# Altium PCB PCB1.PcbDoc
Units mil, origin at the board's own origin, x right, y up, seen from the top; angles counter-clockwise.
Board outline 787.27 x 543.66 mil, 2 copper layers (Top Layer, Bottom Layer); 9 components, 4 nets, 21 pads, 5 vias.
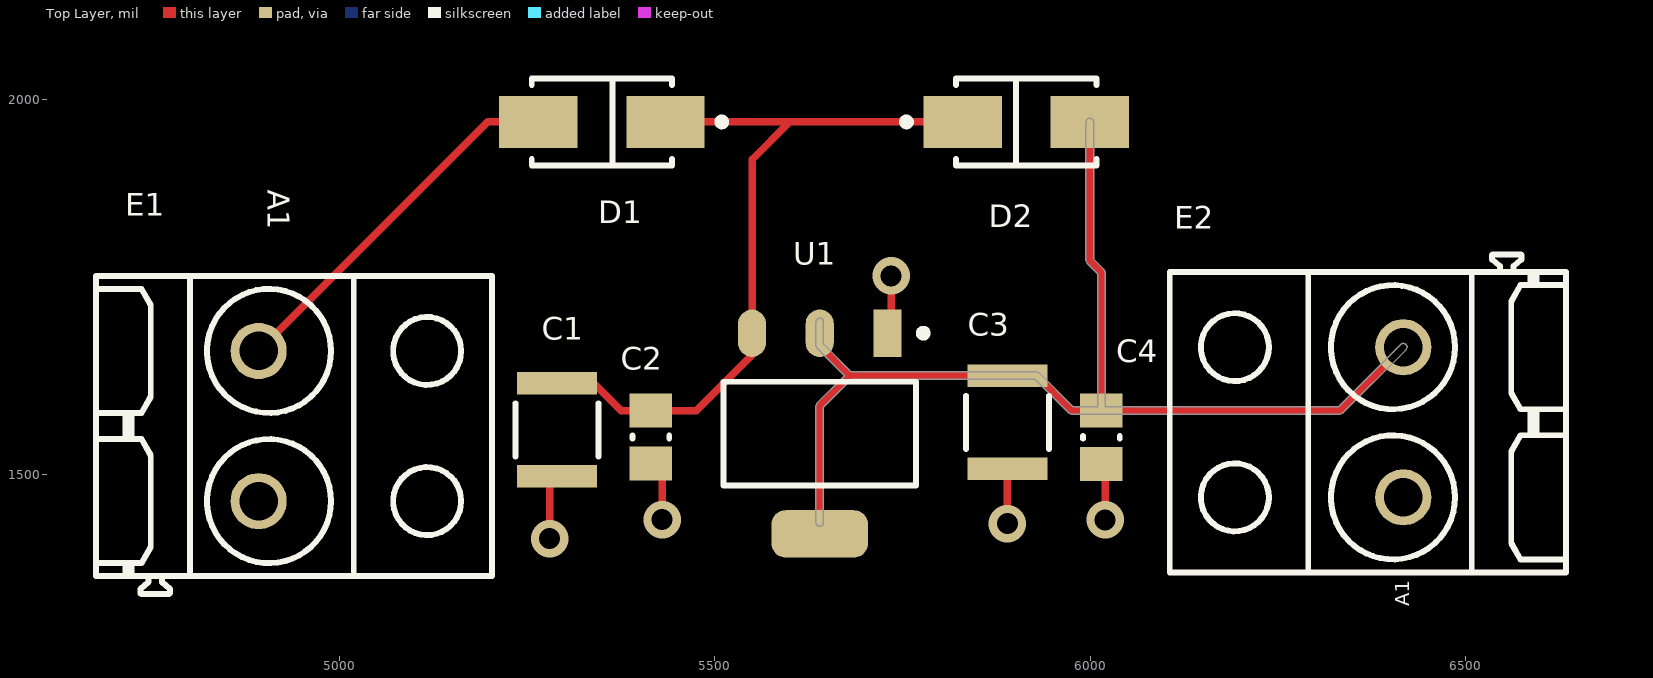
[diagram p0: Top Layer view]
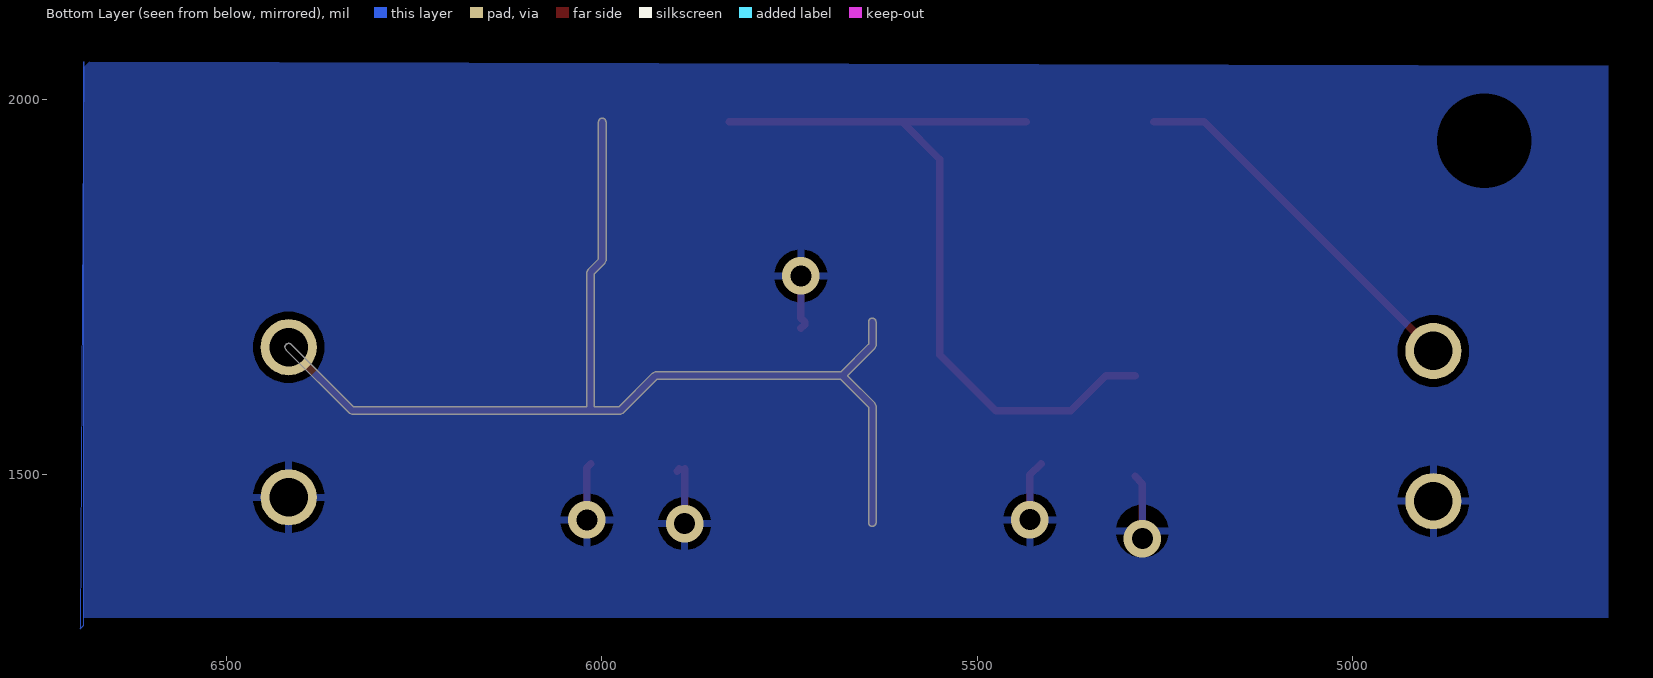
[diagram p1: Bottom Layer view, seen from below]

## Layer stack, top to bottom
Top Solder: solder mask 0.4, Solder Resist, Dk 3.5
Top Layer: signal copper 1.4
Dielectric 1: dielectric 12.6, FR-4, Dk 4.8
Bottom Layer: signal copper 1.4
Bottom Solder: solder mask 0.4, Solder Resist, Dk 3.5

## Board outline
5634.98,1436.34 ccw(c5640,1436.34) 5645.02,1436.34 5645.02,1589.93 5682.08,1626.99 5926.92,1626.99 5972.03,1581.89 5975.57,1580.42 6332.68,1580.42 6336.22,1581.89 6420.79,1666.45 6422.26,1670 ccw(c6417.24,1670) 6413.7,1673.55 6330.6,1590.45 6020.02,1590.45 6020.02,1770 6018.55,1773.55 6004.66,1787.43 6004.66,1970 ccw(c5999.65,1970) 5994.63,1970 5994.63,1785.35 5996.1,1781.81 6009.98,1767.92 6009.98,1590.45 5977.65,1590.45 5932.55,1635.55 5929,1637.02 5682.08,1637.02 5645.02,1674.09 5645.02,1703.66 ccw(c5640,1703.66) 5634.98,1703.66 5634.98,1672.01 5636.45,1668.46 5672.91,1632.01 5636.45,1595.55 5634.98,1592.01

## Design rules (kind name [scope] priority, off if disabled: settings)
Clearance [All] p1: gap=10 ignorepadtopadclearanceinfootprint=FALSE
PolygonConnect [All] p1: connectstyle=Relief reliefconductorwidth=10 reliefentries=4 polygonreliefangle="90 Angle" airgapwidth=10
RoutingVias [All] p1: holewidth=28 width=50 viastyle="Through Hole" minholewidth=28 minwidth=50 maxholewidth=28 maxwidth=50
SolderMaskExpansion [All] p1: expansion=4 istentingtop=FALSE
SupplyNets "Schematic Supply Nets" [InNet('GND')] p1: voltage=0.000
Width [All] p1: maxlimit=10 minlimit=10 preferedwidth=10
30 further rules are at their usual default settings.

## Components (designator, comment, footprint, x,y, rotation, side; value= is the part's Value field where it differs from the comment)
C1 "22uF" FP-C3225-250-0_4-IPC_C 5290,1560 r270 top
C2 "100nF" CAPC0805(2012)100_N 5415,1550.31 r90 top
C3 "22uF" FP-C3225-250-0_4-IPC_C 5890,1570 r270 top
C4 "100nF" CAPC0805(2012)100_N 6015,1550 r90 top
D1 "SS14" FP-403AE-MFG 5350,1970 r0 top
D2 "SS14" FP-403AE-MFG 5915,1970 r180 top
E1 "Vin 5V" LPP_5_08_90_02 4940,1565 r270 top
E2 "Vout 3.3V" LPP_5_08_90_02 6370,1570 r90 top
U1 "AMS1117-3.3" FP-AMS1117-IPC_A 5640,1555 r270 top

## Footprints (in the part's own frame and the unit in brackets; to place one, negate y for a bottom-side part, rotate by r counter-clockwise, add the part's x,y. Pads: shape width x height; smd on the part's side, far side on the other; paste and mask are expansions set on the pad)
CAPC0805(2012)100_N [mm] "Chip Capacitor, Body 2.0x1.2mm, Height 1.0mm, IPC Medium Density"
  rect 1.15x1.45 smd: 1(-0.9,0) 2(0.9,0)
  silkscreen extent -0.05,-0.62 0.05,0.62, body extent -1.1,-0.72 1.1,0.73, height 1
FP-403AE-MFG [mm]
  rect 2.65x1.75 smd paste+0 mask+0: 1(-2.15,0) 2(2.15,0)
  silkscreen extent -2.38,-1.47 4.18,1.47, body extent -3.57,-1.58 3.57,1.58, height 0.25
FP-AMS1117-IPC_A [mm]
  rect 1.604x0.952 smd paste+0 mask+0: 1(-3.395,2.29)
  rrect100% 1.604x0.952 smd paste+0 mask+0: 2(-3.395,0) 3(-3.395,-2.29)
  rrect59% 1.604x3.262 smd paste+0 mask+0: 4(3.395,0)
  silkscreen extent -3.52,-3.25 1.75,3.63, body extent -4.7,-3.75 4.7,3.75, height 0.25
FP-C3225-250-0_4-IPC_C [mm]
  rect 0.753x2.704 smd paste+0 mask+0: 1(-1.575,0) 2(1.575,0)
  silkscreen extent -0.9,-1.4 0.9,1.4, body extent -2.05,-1.5 2.05,1.5, height 0.25
LPP_5_08_90_02 [mm] "OMNIMATE Signal - Serie LP  LPP 5.08/02/90 3.2"
  round 1.9 hole 1.3: A1(-2.54,-1.2) A2(2.54,-1.2)
  silkscreen extent -5.08,-6.7 5.68,6.7, body extent -5.08,-6.7 5.68,6.7, height 17.01

## Part data
C1 C3: library part CMP-08246-001769-2, "Multilayer Ceramic Capacitors 22uF ±20% 25V X7R SMD 1210", RoHS Compliant=Yes
C2 C4: library part CMP-1036-04418-1, "CAP 100nF 50V ±5% 0805 (2012 Metric) Thickness 1mm SMD", Case-EIA=0805, Case-Metric=2012, Rated Voltage="50 V", Tolerance=Â±5%, Max Thickness="1 mm", Technology=SMT
D1 D2: library part CMP-2000-04943-2, "DIODE SCHOTTKY 40V 1A SMA", Forward Current=1A, Manufacturer="ON Semiconductor", Max Junction Temp=+125°C, Max Repetitive Reverse Voltage=40V, Max Surge Forward Current=40A, Package=403AE, Peak Reverse Current=0.2mA, Temperature="-65°C to +125°C", Temperature Range Low=-65°C, Automotive=No, Category=Diode, ComponentLink2Description=Datasheet, ComponentLink2URL=https://www.onsemi.com/pub/Collateral/SS19-D.PDF, Device Class L1="Discrete Semiconductors", Device Class L2=Diodes, Device Class L3="Schottky Diodes", Digikey Description="DIODE SCHOTTKY 40V 1A SMA", Height=2.5mm, Lead Free=Yes, Manufacturer Part Number=SS14, Mouser Description="Schottky Diodes & Rectifiers SMA 40V 1.0A", Octopart=https://octopart.com/ss14-on+semiconductor-29205033, RoHS=TRUE, Standoff Height=0.05mm, Temperature Range High=+125°C
E1 E2: library part CMP-1559-02057-1, "OMNIMATE Signal - series LP", Colour=Orange, Manufacturer=Weidmueller, PartNumber=1594400000, Rated_current_min_no_of_poles_TU_20_deg_C="32 A", Rated_current_use_group_B_UL_1059="20 A", Rated_voltage_for_surge_voltage_class_pollution_degree_II_2="500 V", Rated_voltage_use_group_B_UL_1059="300 V", UL_94_flammability_rating=V-2, ComponentLink1Description="Manufacturer URL", ComponentLink1URL=http://www.weidmueller.com/, ComponentLink2Description="URL Link1", ComponentLink2URL=http://catalog.weidmueller.com/catalog/Start.do?localeId=en&ObjectID=1594400000, Contact_material=Cu-Leg, Contact_surface=tinned, Insulating_material=PA, Mounting_onto_the_PCB="Solder connection", No_of_poles=2, PackageReference=LPP_5_08_90_02, Packaging=Box, Pitch_inch="0,2 inch", Pitch_mm="5,08 mm", Qty="100 PCS", Revision=V1, Short_text_for_material="LPP 5.08/02/90 3.2SN OR BX", Side_termination_characteristic="closed side", Solder_pin_length_mm="3,2 mm", Solid_max_H05_07_V_U="6 mm²", Solid_min_H05_07_V_U="0,5 mm²", Wire_cross_section_AWG_max_UL_1059="AWG 12", Wire_cross_section_AWG_min_UL_1059="AWG 26"
U1: library part CMP-209535-000001-1, "LDO Voltage Regulators 1A, 3.3V", Dropout Voltage=1.1V, Manufacturer="Advanced Monolithic Systems", Max Junction Temp=+125°C, Max Power Dissipation=1.2W, Max Supply Voltage=15V, Nominal Supply Current=5mA, Output Current=1A, Output Voltage=3.3V, Package=AMS1117, Temperature="-40°C to +125°C", Temperature Range Low=-40°C, Automotive=No, Category=IC, ComponentLink2Description=Datasheet, ComponentLink2URL=http://www.advanced-monolithic.com/pdf/ds1117.pdf, Device Class L1="Integrated Circuits (ICs)", Device Class L2="Power Management ICs", Device Class L3="Voltage Regulators - Linear", Height=1.8mm, Ipc Land Pattern Name=SOT229P700X180-4, Lead Free=Yes, Manufacturer Part Number=AMS1117-3.3, Number Of Outputs=1, Octopart=https://octopart.com/ams1117-3.3-advanced+monolithic+systems-25899300, Output Type=Fixed, RoHS=TRUE, Standoff Height=0.64mm, Temperature Range High=+125°C

## Free pads (board coordinates)
  round 60 hole 125.98: 1(4825,1945)

## Via types
v1: diameter 50, hole 28, Top Layer to Bottom Layer, 5 vias

## Nets (pads, with @x,y where several pads share a name; then routed paths per layer and width w, separated by ;. In a path a pad name is that pad's centre, name@x,y a point inside that pad or via, vN(x,y) a via of type N, cw(c..) or ccw(c..) an arc to the next point about the centre after c; other vN are vias at no path point)
GND: C1.2 C2.1 C3.2 C4.1 E1.A2 E2.A1 U1.1 | length 395.6
  Top Layer w10: v1(5280.39,1415) 5280.39,1488.38 C1.2 ; C2.1 5430,1499.88 v1(5430,1440.31) ; U1.1@5735,1695 5730.16,1699.84 5730.16,1703.66 5735,1708.5 v1(5735,1765) ; v1(5890,1435) C3.2 ; C3.2@5897.01,1507.99 C3.2@5900,1505 ; C4.1 6020,1509.57 v1(6020,1440)
NetC1_1: C1.1 C2.2 D1.2 D2.2 U1.3 | length 1036.4
  Top Layer w10: C1.1@5290,1632.01 5329,1632.01 5375.57,1585.43 5415,1585.43 5475.28,1585.43 5549.84,1660 5549.84,1703.66 5549.84,1920 5599.84,1970 ; D1.2 5599.84,1970 ; D2.2 5599.84,1970
NetC3_1: C3.1 C4.2 D2.1 E2.A2 U1.2 U1.4 | length 1483
  Top Layer w10: U1.4@5640,1436.34 5640,1592.01 5680,1632.01 ; U1.2@5640,1703.66 5640,1672.01 5680,1632.01 ; D2.1 5999.65,1785.35 6015,1770 C4.2 ; E2.A2 6332.68,1585.43 C4.2 ; 5680,1632.01 C3.1 5929,1632.01 5975.57,1585.43 C4.2
NetD1_1: D1.1 E1.A1 | length 498.9
  Top Layer w10: E1.A1 5197.76,1970 D1.1

## Polygon pours and split planes (outlines as drawn)
GND on Bottom Layer "GND_L02_P000" (solid, pour order 0): 4660,2045 4660,1310 6690,1310 6690,2050
GND on Bottom Layer "GND_L02_P001" (solid, remove dead copper, pour order 1): 6695,1295 6690,1300 6690,2050

## Silkscreen, mask and mechanical layers (free items; w line width, h text height)
Mechanical 1:
  lines w10: 4660,1310 6690,1310 6690,2050 6685,2045 4660,2045 4660,1310

## Text inside footprints (layer, text, board x,y; h text height)
E1: Top Overlay "A1" at 4905,1880 h29.05 r270
E2: Top Overlay "A1" at 6425,1325 h19.05 r90